# Altium PCB ARM_V2.PcbDoc (part 1 of 2)
Units mm, origin at the board's own origin, x right, y up, seen from the top; angles counter-clockwise.
Board outline 152.4 x 101.6 mm, 2 copper layers (Top Layer, Bottom Layer); 163 components, 114 nets, 562 pads, 0 vias.
Unrouted connection lines stored in the file: 405.
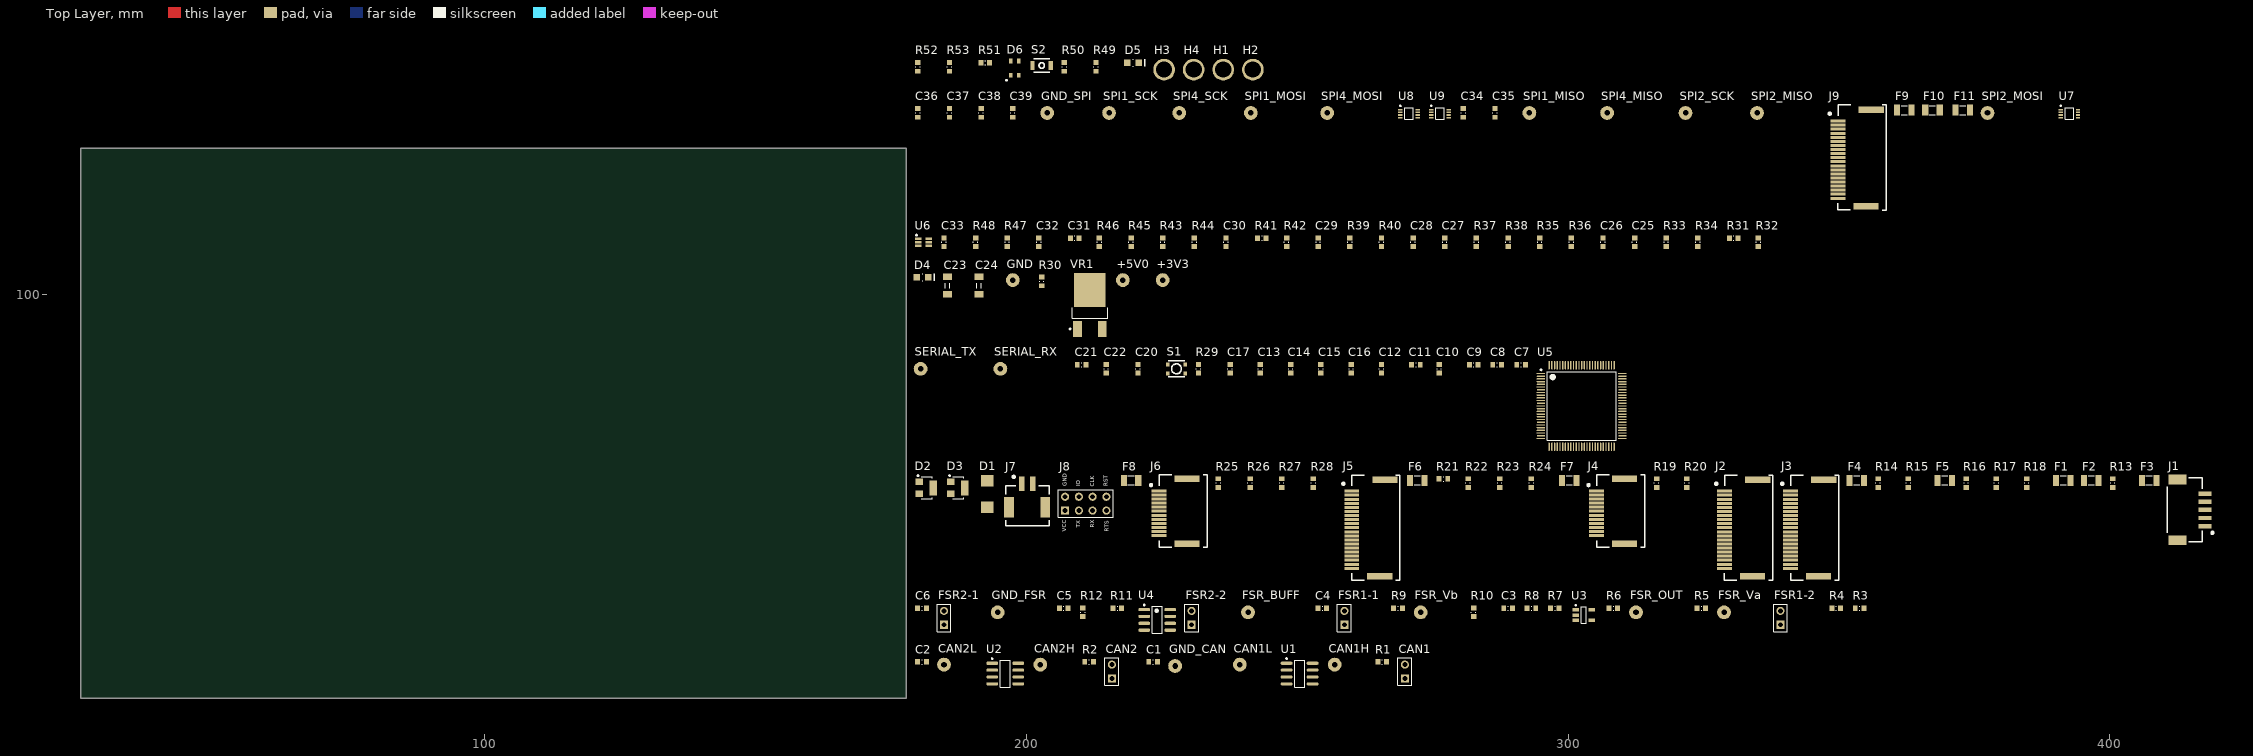
[diagram p0: Top Layer view]
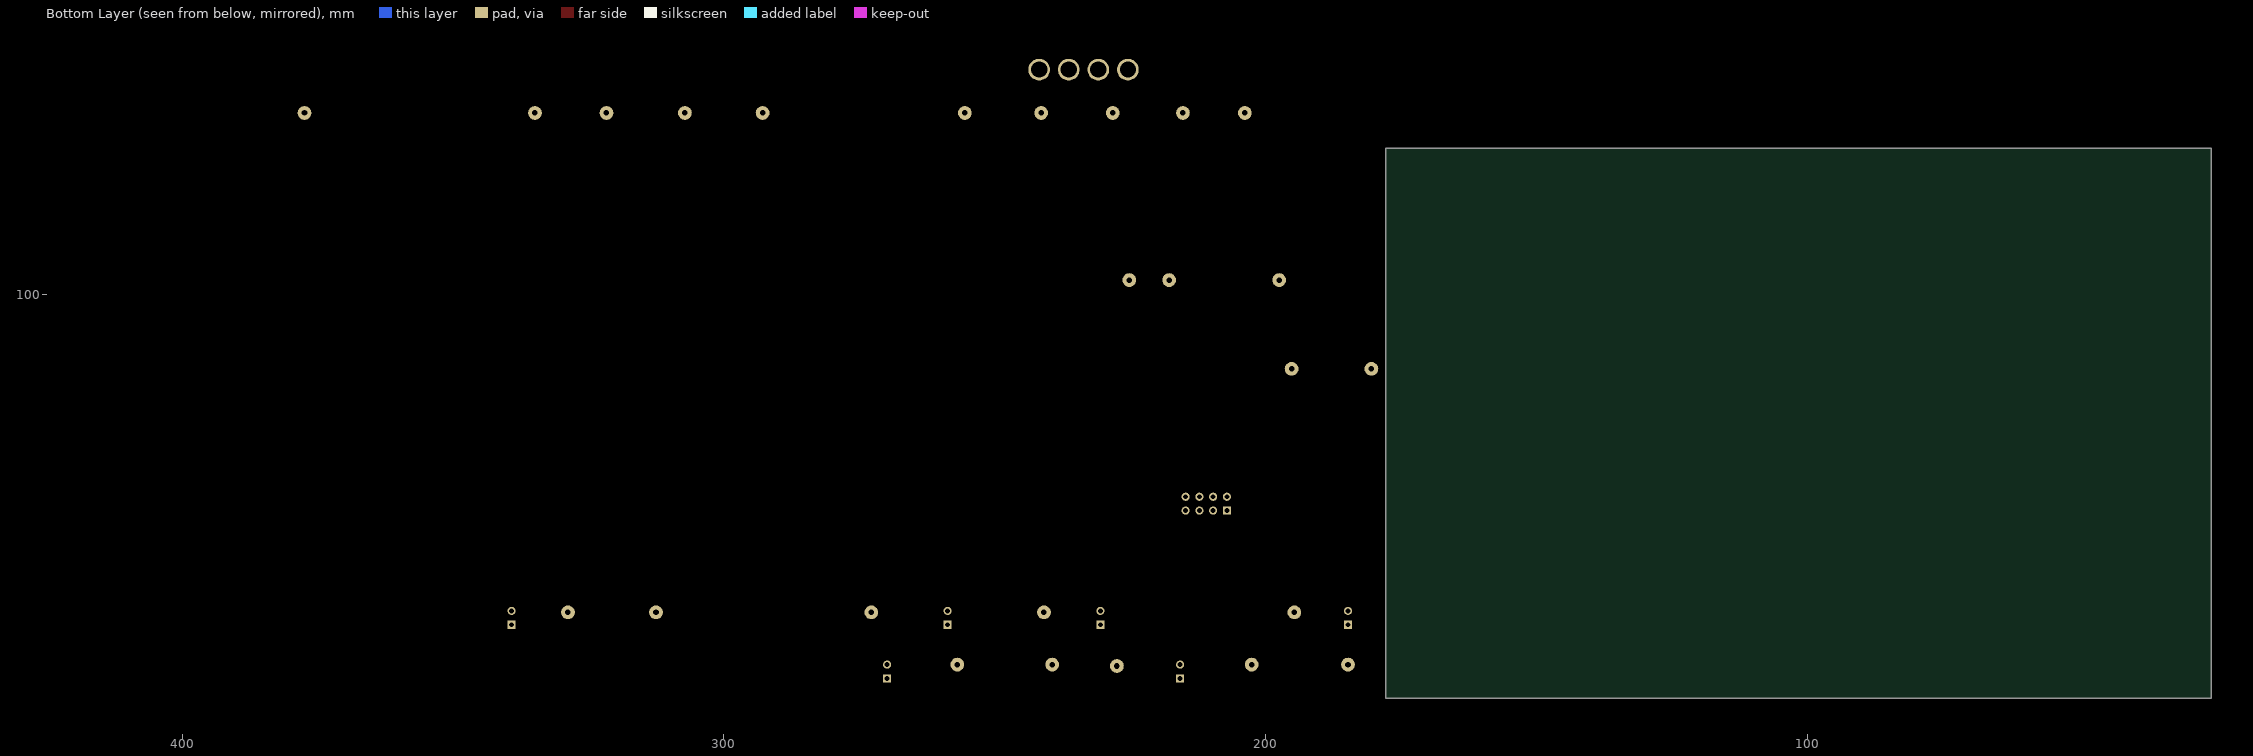
[diagram p1: Bottom Layer view, seen from below]

## Layer stack, top to bottom
Top Solder: solder mask 0.0102, Solder Resist, Dk 3.5
Top Layer: signal copper 0.0356
Dielectric 1: dielectric 0.32, FR-4, Dk 4.8
Bottom Layer: signal copper 0.0356
Bottom Solder: solder mask 0.0102, Solder Resist, Dk 3.5

## Board outline
25.4,25.4 177.8,25.4 177.8,127 25.4,127

## Design rules (kind name [scope] priority, off if disabled: settings)
Clearance [All] p1: gap=0.254 ignorepadtopadclearanceinfootprint=FALSE except(0: Arc-Hole Track-Hole SMDPad-Hole THPad-Hole Via-Hole Fill-Hole Poly-Hole Region-Hole Text-Hole)
DiffPairsRouting [All] p1: maxlimit=0.254 minlimit=0.254 mostfreqgap=0.254 toplayer_minwidth=0.381 toplayer_maxwidth=0.381 toplayer_prefwidth=0.381 bottomlayer_minwidth=0.381 bottomlayer_maxwidth=0.381 bottomlayer_prefwidth=0.381 maxuncoupledlength=12.7
PolygonConnect [All] p1: connectstyle=Relief reliefconductorwidth=0.254 reliefentries=4 polygonreliefangle="90 Angle" airgapwidth=0.254
RoomDefinition Support [InComponentClass('Support')] p1: confinementstyle=ConfineIn formatcopy=TRUE lockcomponents=FALSE outline 178.943,139.065 244.094,139.065 244.094,146.304 178.943,146.304
RoomDefinition "SPI Encoders" [InComponentClass('SPI Encoders')] p2: confinementstyle=ConfineIn formatcopy=TRUE lockcomponents=FALSE outline 178.943,115.189 394.97,115.189 394.97,137.795 178.943,137.795
RoomDefinition "Servo and Encoders" [InComponentClass('Servo and Encoders')] p3: confinementstyle=ConfineIn formatcopy=TRUE lockcomponents=FALSE outline 178.943,107.823 339.09,107.823 339.09,113.919 178.943,113.919
RoomDefinition POWER [InComponentClass('POWER')] p4: confinementstyle=ConfineIn formatcopy=TRUE lockcomponents=FALSE outline 178.943,91.821 230.124,91.821 230.124,106.68 178.943,106.68
RoomDefinition MCU [InComponentClass('MCU')] p5: confinementstyle=ConfineIn formatcopy=TRUE lockcomponents=FALSE outline 178.943,70.739 311.15,70.739 311.15,90.551 178.943,90.551
RoomDefinition "Integrated Connectors" [InComponentClass('Integrated Connectors')] p6: confinementstyle=ConfineIn formatcopy=TRUE lockcomponents=FALSE outline 178.943,46.863 419.608,46.863 419.608,69.469 178.943,69.469
RoomDefinition FSR [InComponentClass('FSR')] p7: confinementstyle=ConfineIn formatcopy=TRUE lockcomponents=FALSE outline 178.943,36.957 355.6,36.957 355.6,45.593 178.943,45.593
RoomDefinition CAN [InComponentClass('CAN')] p8: confinementstyle=ConfineIn formatcopy=TRUE lockcomponents=FALSE outline 178.943,26.924 274.32,26.924 274.32,35.687 178.943,35.687
RoutingVias [All] p1: holewidth=0.711 width=1.27 viastyle="Through Hole" minholewidth=0.711 minwidth=1.27 maxholewidth=0.711 maxwidth=1.27
SolderMaskExpansion [All] p1: expansion=0.102
Width [All] p1: maxlimit=0.254 minlimit=0.254 preferedwidth=0.254
29 further rules are at their usual default settings.

## Classes and differential pairs
component class Support: D5 D6 H1 H2 H3 H4 R49 R50 R51 R52 R53 S2
component class "SPI Encoders": C34 C35 C36 C37 C38 C39 F9 F10 F11 GND_SPI J9 SPI1_MISO SPI1_MOSI SPI1_SCK SPI2_MISO SPI2_MOSI SPI2_SCK SPI4_MISO SPI4_MOSI SPI4_SCK U7 U8 U9
component class "Servo and Encoders": C25 C26 C27 C28 C29 C30 C31 C32 C33 R31 R32 R33 R34 R35 R36 R37 R38 R39 R40 R41 R42 R43 R44 R45 R46 R47 R48 U6
component class POWER: +3V3 +5V0 C23 C24 D4 GND R30 VR1
component class MCU: C7 C8 C9 C10 C11 C12 C13 C14 C15 C16 C17 C18 C19 C20 C21 C22 R29 S1 SERIAL_RX SERIAL_TX U5 Y1
component class "Integrated Connectors": D1 D2 D3 F1 F2 F3 F4 F5 F6 F7 F8 J1 J2 J3 J4 J5 J6 J7 J8 R13 R14 R15 R16 R17 R18 R19 R20 R21 R22 R23 R24 R25 R26 R27 R28
component class FSR: C3 C4 C5 C6 FSR1-1 FSR1-2 FSR2-1 FSR2-2 FSR_BUFF FSR_OUT FSR_Va FSR_Vb GND_FSR R3 R4 R5 R6 R7 R8 R9 R10 R11 R12 U3 U4
component class CAN: C1 C2 CAN1 CAN1H CAN1L CAN2 CAN2H CAN2L GND_CAN R1 R2 U1 U2
differential pair CAN2: +CAN2_P -CAN2_N
differential pair CAN1: +CAN1_P -CAN1_N

## Components (designator, comment, footprint, x,y, rotation, side; value= is the part's Value field where it differs from the comment)
+3V3 "TESTPOINT_LOOP" TESTPOINT_LOOP 225.171,102.616 r90 top
+5V0 "TESTPOINT_LOOP" TESTPOINT_LOOP 217.805,102.616 r90 top
C1 "CAP_0.1uF_50V_0603" CAPC0603(1608)55_N 223.393,32.131 r0 top value=0.1uF
C2 "CAP_0.1uF_50V_0603" CAPC0603(1608)55_N 180.721,32.131 r0 top value=0.1uF
C3 "CAP_0.1uF_50V_0603" CAPC0603(1608)55_N 288.925,42.037 r0 top value=0.1uF
C4 "CAP_0.1uF_50V_0603" CAPC0603(1608)55_N 254.635,42.037 r0 top value=0.1uF
C5 "CAP_0.1uF_50V_0603" CAPC0603(1608)55_N 206.883,42.037 r0 top value=0.1uF
C6 "CAP_0.1uF_50V_0603" CAPC0603(1608)55_N 180.721,42.037 r0 top value=0.1uF
C7 "CAP_0.1uF_50V_0603" CAPC0603(1608)55_N 291.338,86.995 r0 top value=0.1uF
C8 "CAP_0.1uF_50V_0603" CAPC0603(1608)55_N 286.893,86.995 r0 top value=0.1uF
C9 "CAP_0.1uF_50V_0603" CAPC0603(1608)55_N 282.575,86.995 r0 top value=0.1uF
C10 "CAP_0.1uF_50V_0603" CAPC0603(1608)55_N 276.225,86.233 r90 top value=0.1uF
C11 "CAP_0.1uF_50V_0603" CAPC0603(1608)55_N 271.907,86.995 r0 top value=0.1uF
C12 "CAP_0.1uF_50V_0603" CAPC0603(1608)55_N 265.557,86.233 r90 top value=0.1uF
C13 "CAP_10nF_0603" CAPC0603(1608)55_N 243.205,86.233 r90 top value=10nF
C14 "CAP_0.1uF_50V_0603" CAPC0603(1608)55_N 248.793,86.233 r90 top value=0.1uF
C15 "CAP_10nF_0603" CAPC0603(1608)55_N 254.381,86.233 r90 top value=10nF
C16 "CAP_1uF_16V_0603" CAPC0603(1608)55_N 259.969,86.233 r90 top value=1uF
C17 "CAP_0.1uF_50V_0603" CAPC0603(1608)55_N 237.617,86.233 r90 top value=0.1uF
C20 "CAP_0.1uF_50V_0603" CAPC0603(1608)55_N 220.599,86.233 r90 top value=0.1uF
C21 "CAP_4.7uF_0603" CAPC0603(1608)55_N 210.185,86.995 r0 top value=4.7uF
C22 "CAP_4.7uF_0603" CAPC0603(1608)55_N 214.757,86.233 r90 top value=4.7uF
C23 "10uF" CAPC1206(3216) 185.42,101.6 r90 top
C24 "10uF" CAPC1206(3216) 191.262,101.6 r90 top
C25 "CAP_DNP_0603_1_1" CAPC0603(1608)55_N 312.293,109.601 r90 top value=DNP
C26 "CAP_DNP_0603_1_1" CAPC0603(1608)55_N 306.451,109.601 r90 top value=DNP
C27 "CAP_DNP_0603_1_1" CAPC0603(1608)55_N 277.241,109.601 r90 top value=DNP
C28 "CAP_DNP_0603_1_1" CAPC0603(1608)55_N 271.399,109.601 r90 top value=DNP
C29 "CAP_DNP_0603_1_1" CAPC0603(1608)55_N 253.873,109.601 r90 top value=DNP
C30 "CAP_DNP_0603_1_1" CAPC0603(1608)55_N 236.855,109.601 r90 top value=DNP
C31 "CAP_DNP_0603_1_1" CAPC0603(1608)55_N 208.915,110.363 r0 top value=DNP
C32 "CAP_DNP_0603_1_1" CAPC0603(1608)55_N 202.311,109.601 r90 top value=DNP
C33 "CAP_DNP_0603_1_1" CAPC0603(1608)55_N 184.785,109.601 r90 top value=DNP
C34 "CAP_0.1uF_50V_0603" CAPC0603(1608)55_N 280.67,133.477 r90 top value=0.1uF
C35 "CAP_0.1uF_50V_0603" CAPC0603(1608)55_N 286.512,133.477 r90 top value=0.1uF
C36 "CAP_0.1uF_50V_0603" CAPC0603(1608)55_N 179.959,133.477 r90 top value=0.1uF
C37 "CAP_0.1uF_50V_0603" CAPC0603(1608)55_N 185.801,133.477 r90 top value=0.1uF
C38 "CAP_0.1uF_50V_0603" CAPC0603(1608)55_N 191.643,133.477 r90 top value=0.1uF
C39 "CAP_0.1uF_50V_0603" CAPC0603(1608)55_N 197.485,133.477 r90 top value=0.1uF
CAN1 "JUMPER_2" HDR1X2 269.875,29.083 r90 top
CAN1H "TESTPOINT_LOOP" TESTPOINT_LOOP 256.921,31.623 r90 top
CAN1L "TESTPOINT_LOOP" TESTPOINT_LOOP 239.395,31.623 r90 top
CAN2 "JUMPER_2" HDR1X2 215.773,29.083 r90 top
CAN2H "TESTPOINT_LOOP" TESTPOINT_LOOP 202.565,31.623 r90 top
CAN2L "TESTPOINT_LOOP" TESTPOINT_LOOP 184.785,31.623 r90 top
D1 "TVS_DIODE_BIDIRECTIONAL" TVS_DIODE_BIDIRECTIONAL 192.786,63.119 r90 top
D2 "TVS_DIODE_CAN" TVS_DIODE_CAN 181.483,64.262 r0 top
D3 "TVS_DIODE_CAN" TVS_DIODE_CAN 187.325,64.262 r0 top
D4 "DIO_LED_G" LED_0805_LINE 180.848,103.124 r0 top
D5 "DIO_LED_G" LED_0805_LINE 219.71,142.748 r0 top
D6 "LED_RGB" LED_RGB 197.866,141.732 r0 top
F1 "FUSE_125mA_1206" FUSE_1206 391.414,65.659 r0 top
F2 "FUSE_1.25A_1206" FUSE_1206 396.621,65.659 r0 top
F3 "FUSE_125mA_1206" FUSE_1206 407.289,65.659 r0 top
F4 "FUSE_125mA_1206" FUSE_1206 353.314,65.659 r0 top
F5 "FUSE_125mA_1206" FUSE_1206 369.57,65.659 r0 top
F6 "FUSE_125mA_1206" FUSE_1206 272.161,65.659 r0 top
F7 "FUSE_125mA_1206" FUSE_1206 300.228,65.659 r0 top
F8 "FUSE_2A_1206" FUSE_1206 219.329,65.659 r0 top
F9 "FUSE_125mA_1206" FUSE_1206 362.077,133.985 r0 top
F10 "FUSE_125mA_1206" FUSE_1206 367.284,133.985 r0 top
F11 "FUSE_125mA_1206" FUSE_1206 372.872,133.985 r0 top
FSR1-1 "JUMPER_2" HDR1X2 258.699,38.989 r90 top
FSR1-2 "JUMPER_2" HDR1X2 339.217,38.989 r90 top
FSR2-1 "JUMPER_2" HDR1X2 184.785,38.989 r90 top
FSR2-2 "JUMPER_2" HDR1X2 230.505,38.989 r90 top
FSR_BUFF "TESTPOINT_LOOP" TESTPOINT_LOOP 240.919,41.275 r90 top
FSR_OUT "TESTPOINT_LOOP" TESTPOINT_LOOP 312.547,41.275 r90 top
FSR_Va "TESTPOINT_LOOP" TESTPOINT_LOOP 328.803,41.275 r90 top
FSR_Vb "TESTPOINT_LOOP" TESTPOINT_LOOP 272.796,41.275 r90 top
GND "TESTPOINT_LOOP" TESTPOINT_LOOP 197.485,102.616 r0 top
GND_CAN "TESTPOINT_LOOP" TESTPOINT_LOOP 227.457,31.369 r90 top
GND_FSR "TESTPOINT_LOOP" TESTPOINT_LOOP 194.691,41.275 r90 top
GND_SPI "TESTPOINT_LOOP" TESTPOINT_LOOP 203.835,133.477 r90 top
H1 "MOUNTING_HOLES" MOUNTING_HOLE 236.347,141.478 r0 top
H2 "MOUNTING_HOLES" MOUNTING_HOLE 241.808,141.478 r0 top
H3 "MOUNTING_HOLES" MOUNTING_HOLE 225.425,141.478 r0 top
H4 "MOUNTING_HOLES" MOUNTING_HOLE 230.886,141.478 r0 top
J1 "CON_5M_SM_VT" MOLEX-5025840570 415.036,60.198 r90 top
J2 "CON_10x2M_SM_RA" MOLEX-5031482090 331.47,56.896 r90 top
J3 "CON_10x2M_SM_RA" MOLEX-5031482090 343.662,56.896 r90 top
J4 "CON_6x2M_SM_RA" MOLEX-5031481290 307.848,59.944 r90 top
J5 "CON_10x2M_SM_RA" MOLEX-5031482090 262.636,56.896 r90 top
J6 "CON_6x2M_SM_RA" MOLEX-5031481290 227.076,59.944 r90 top
J7 "CON_2M_SM_RA" MOLEX-5024940270 200.152,62.865 r0 top
J8 "HEADER 4X2" HEADER_2X4 207.137,60.071 r0 top
J9 "CON_10x2M_SM_RA" MOLEX-5031482090 352.425,125.222 r90 top
R1 "RES_120R_0603" RESC0603(1608)_N 265.684,32.131 r0 top value=120R
R2 "RES_120R_0603" RESC0603(1608)_N 211.582,32.131 r0 top value=120R
R3 "RES_825K_0603" RESC0603(1608)_N 353.822,42.037 r0 top value=825K
R4 "1.1K 1%" RESC0603(1608)_N 349.504,42.037 r0 top value=1K1
R5 "RES_165K_0603" RESC0603(1608)_N 324.612,42.037 r0 top value=165K
R6 "RES_14K3_0603" RESC0603(1608)_N 308.356,42.037 r0 top value=14K3
R7 "RES_165K_0603" RESC0603(1608)_N 297.561,42.037 r0 top value=165K
R8 "RES_2K2_0603" RESC0603(1608)_N 293.243,42.037 r0 top value=2K2
R9 "14.3K 1%" RESC0603(1608)_N 268.605,42.037 r0 top value=14K3
R10 "RES_825K_0603" RESC0603(1608)_N 282.575,41.275 r90 top value=825K
R11 "RES_14K3_0603" RESC0603(1608)_N 216.789,42.037 r0 top value=14K3
R12 "RES_1K_0603" RESC0603(1608)_N 210.439,41.275 r90 top value=1K
R13 "RES_10K_0603" RESC0603(1608)_N 400.558,65.151 r90 top value=10K
R14 "RES_10K_0603" RESC0603(1608)_N 357.251,65.151 r90 top value=10K
R15 "RES_10K_0603" RESC0603(1608)_N 362.839,65.151 r90 top value=10K
R16 "RES_10K_0603" RESC0603(1608)_N 373.507,65.151 r90 top value=10K
R17 "RES_10K_0603" RESC0603(1608)_N 379.095,65.151 r90 top value=10K
R18 "RES_10K_0603" RESC0603(1608)_N 384.683,65.151 r90 top value=10K
R19 "RES_10K_0603" RESC0603(1608)_N 316.357,65.151 r90 top value=10K
R20 "RES_10K_0603" RESC0603(1608)_N 321.945,65.151 r90 top value=10K
R21 "RES_10K_0603" RESC0603(1608)_N 276.987,65.913 r0 top value=10K
R22 "RES_10K_0603" RESC0603(1608)_N 281.559,65.151 r90 top value=10K
R23 "RES_10K_0603" RESC0603(1608)_N 287.401,65.151 r90 top value=10K
R24 "RES_10K_0603" RESC0603(1608)_N 293.243,65.151 r90 top value=10K
R25 "RES_10K_0603" RESC0603(1608)_N 235.458,65.151 r90 top value=10K
R26 "RES_10K_0603" RESC0603(1608)_N 241.3,65.151 r90 top value=10K
R27 "RES_10K_0603" RESC0603(1608)_N 247.142,65.151 r90 top value=10K
R28 "RES_10K_0603" RESC0603(1608)_N 252.984,65.151 r90 top value=10K
R29 "RES_10K_0603" RESC0603(1608)_N 231.775,86.233 r90 top value=10K
R30 "RES_120R_0603" RESC0603(1608)_N 202.819,102.362 r90 top value=120R
R31 "RES_2K2_0603" RESC0603(1608)_N 330.581,110.363 r0 top value=2K2
R32 "RES_2K2_0603" RESC0603(1608)_N 335.153,109.601 r90 top value=2K2
R33 "RES_3K3_0603" RESC0603(1608)_N 318.135,109.601 r90 top value=3K3
R34 "RES_3K3_0603" RESC0603(1608)_N 323.977,109.601 r90 top value=3K3
R35 "RES_2K2_0603" RESC0603(1608)_N 294.767,109.601 r90 top value=2K2
R36 "RES_2K2_0603" RESC0603(1608)_N 300.609,109.601 r90 top value=2K2
R37 "RES_3K3_0603" RESC0603(1608)_N 283.083,109.601 r90 top value=3K3
R38 "RES_3K3_0603" RESC0603(1608)_N 288.925,109.601 r90 top value=3K3
R39 "RES_2K2_0603" RESC0603(1608)_N 259.715,109.601 r90 top value=2K2
R40 "RES_2K2_0603" RESC0603(1608)_N 265.557,109.601 r90 top value=2K2
R41 "RES_3K3_0603" RESC0603(1608)_N 243.459,110.363 r0 top value=3K3
R42 "RES_3K3_0603" RESC0603(1608)_N 248.031,109.601 r90 top value=3K3
R43 "RES_2K2_0603" RESC0603(1608)_N 225.171,109.601 r90 top value=2K2
R44 "RES_2K2_0603" RESC0603(1608)_N 231.013,109.601 r90 top value=2K2
R45 "RES_3K3_0603" RESC0603(1608)_N 219.329,109.601 r90 top value=3K3
R46 "RES_3K3_0603" RESC0603(1608)_N 213.487,109.601 r90 top value=3K3
R47 "RES_2K2_0603" RESC0603(1608)_N 196.469,109.601 r90 top value=2K2
R48 "RES_3K3_0603" RESC0603(1608)_N 190.627,109.601 r90 top value=3K3
R49 "RES_120R_0603" RESC0603(1608)_N 212.852,141.986 r90 top value=120R
R50 "RES_10K_0603" RESC0603(1608)_N 207.01,141.986 r90 top value=10K
R51 "RES_20R_0603" RESC0603(1608)_N 192.405,142.748 r0 top value=20R
R52 "RES_120R_0603" RESC0603(1608)_N 179.959,141.986 r90 top value=120R
R53 "RES_20R_0603" RESC0603(1608)_N 185.801,141.986 r90 top value=20R
S1 "SW_PWR" PTS830GM140 227.711,86.233 r0 top
S2 "SW_TACTILE" B3U-1100P 202.819,142.24 r0 top
SERIAL_RX "TESTPOINT_LOOP" TESTPOINT_LOOP 195.199,86.233 r90 top
SERIAL_TX "TESTPOINT_LOOP" TESTPOINT_LOOP 180.467,86.233 r90 top
SPI1_MISO "TESTPOINT_LOOP" TESTPOINT_LOOP 292.862,133.477 r90 top
SPI1_MOSI "TESTPOINT_LOOP" TESTPOINT_LOOP 241.427,133.477 r90 top
SPI1_SCK "TESTPOINT_LOOP" TESTPOINT_LOOP 215.265,133.477 r90 top
SPI2_MISO "TESTPOINT_LOOP" TESTPOINT_LOOP 334.899,133.477 r90 top
SPI2_MOSI "TESTPOINT_LOOP" TESTPOINT_LOOP 377.444,133.477 r90 top
SPI2_SCK "TESTPOINT_LOOP" TESTPOINT_LOOP 321.691,133.477 r90 top
SPI4_MISO "TESTPOINT_LOOP" TESTPOINT_LOOP 307.213,133.477 r90 top
SPI4_MOSI "TESTPOINT_LOOP" TESTPOINT_LOOP 255.524,133.477 r90 top
SPI4_SCK "TESTPOINT_LOOP" TESTPOINT_LOOP 228.219,133.477 r90 top
U1 "IC TXRX CAN" LT-S8_N 250.444,29.972 r0 top
U2 "IC TXRX CAN" LT-S8_N 196.088,29.972 r0 top
U3 "OPA313IDBVR" DBV0005A_M 302.895,40.767 r0 top
U4 "CA3140AMZ" CA3140AMZ 224.155,39.878 r0 top
U5 "STM32F446VET7" STM-LQFP100_L 302.514,79.375 r0 top
U6 "SN74LVC1T45QDCKRQ1" SOT65P210X110-6N 180.975,109.601 r0 top
U7 "SN74LVC2T45DCURG4" DCU0008A_N 392.557,133.35 r0 top
U8 "SN74LVC2T45DCURG4" DCU0008A_N 270.637,133.35 r0 top
U9 "SN74LVC2T45DCURG4" DCU0008A_N 276.352,133.35 r0 top
VR1 "5V0_3V3_LDO" VOLTAGE_REGULATOR 211.709,96.393 r0 top

## Footprints (in the part's own frame and the unit in brackets; to place one, negate y for a bottom-side part, rotate by r counter-clockwise, add the part's x,y. Pads: shape width x height; smd on the part's side, far side on the other; paste and mask are expansions set on the pad)
B3U-1100P [mm] "TACTILE SWITCH GREY"
  rect 0.8x1.7 smd: 1(-1.7,0) 2(1.7,0)
  silkscreen extent -1.5,-1.25 1.5,1.25, body extent -2,-1.25 2,1.25, height 1.6
CA3140AMZ [mm]
  oval 2.2x0.6 smd: 1(-2.4,1.905) 2(-2.4,0.635) 3(-2.4,-0.635) 4(-2.4,-1.905) 5(2.4,-1.905) 6(2.4,-0.635) 7(2.4,0.635) 8(2.4,1.905)
  silkscreen extent -2.52,-2.5 0.9,2.88, body extent -2,-2.5 2,2.5, height 1.75
CAPC0603(1608)55_N [mm] "Chip Capacitor, Body 1.6x0.8mm, Height 0.55mm, IPC Medium Density"
  rect 0.9x1 smd: 1(-0.8,0) 2(0.8,0)
  silkscreen extent -0.05,-0.4 0.05,0.4, body extent -0.87,-0.48 0.88,0.47, height 0.55
CAPC1206(3216) [mm] "Chip Capacitor, Body 3.2x1.6mm, Height 0.55mm, IPC Medium Density"
  rect 1.2x1.7 smd: 1(-1.6,0) 2(1.6,0)
  silkscreen extent -0.45,-0.4 0.45,0.4, body extent -1.6,-0.85 1.6,0.85, height 1.75
DBV0005A_M [mm] "SOT23, 5-Leads, Body 3.05x1.75mm, Pitch 0.95mm, IPC Low Density"
  rrect15% 1.2x0.65 smd: 1(-1.475,0.95) 2(-1.475,0) 3(-1.475,-0.95) 4(1.475,-0.95) 5(1.475,0.95)
  silkscreen extent -1.6,-1.55 0.5,1.95, body extent -1.42,-1.46 1.42,1.46, height 1.08
DCU0008A_N [mm] "SOP, 8-Leads, Body 2.4x2.1mm, Pitch 0.5mm, IPC Medium Density"
  rrect33% 0.8x0.3 smd: 1(-1.6,0.75) 2(-1.6,0.25) 3(-1.6,-0.25) 4(-1.6,-0.75) 5(1.6,-0.75) 6(1.6,-0.25) 7(1.6,0.25) 8(1.6,0.75)
  silkscreen extent -1.72,-1.05 0.8,1.57, body extent -1.56,-1 1.56,1, height 0.9
FUSE_1206 [mil]
  rect 45x80 smd mask+1: 1(-52.5,0) 2(52.5,0)
  silkscreen extent -23,-32 22,32, body extent -65,-32 65,32, height 32
HDR1X2 [mm] "Connector; Header; 2 Position"
  rect 1.5x1.5 hole 0.9: 1(0,0)
  round 1.5 hole 0.9: 2(2.54,0)
  silkscreen extent -1.27,-1.27 3.81,1.27, body extent -1.27,-1.27 3.81,1.27, height 6.35
HEADER_2X4 [mm]
  rect 1.5x1.5 hole 0.9: 1(0,0)
  round 1.5 hole 0.9: 2(2.54,0) 3(5.08,0) 4(7.62,0) 5(0,2.54) 6(2.54,2.54) 7(5.08,2.54) 8(7.62,2.54)
  silkscreen extent -1.27,-1.27 8.89,3.81, body extent -1.36,-1.32 8.8,3.67, height 8.54
LED_0805_LINE [mm] "SMD, 2-Leads, Body 2x1.25mm"
  rect 1.2x1.2 smd: 1(-1.05,0) 2(1.05,0)
  silkscreen extent -0.05,-0.64 2.16,0.64, body extent -1,-0.63 1,0.63, height 0.8
LED_RGB [mm]
  rect 0.7x0.86 smd: 1(-0.737,-1.325) 2(-0.737,1.325) 3(0.738,1.325) 4(0.738,-1.325)
  silkscreen extent -1.65,-2.35 -1.4,-2.1, body extent -1.4,-1.75 1.4,1.75, height 1.89
LT-S8_N [mm] "SOP, 8-Leads, Body 4.9x3.9mm, Pitch 1.27mm, IPC Medium Density"
  oval 2.2x0.6 smd: 1(-2.4,1.905) 2(-2.4,0.635) 3(-2.4,-0.635) 4(-2.4,-1.905) 5(2.4,-1.905) 6(2.4,-0.635) 7(2.4,0.635) 8(2.4,1.905)
  silkscreen extent -2.52,-2.5 0.9,2.88, body extent -2,-2.5 2,2.5, height 1.76
MOLEX-5024940270 [mm] "Molex 5024940670 2 pin 2mm pitch SMD RA connector"
  rect 1.8x3.8 smd: 0(-3.35,-2.175) 0(3.35,-2.175)
  rect 1x2.7 smd: 1(-1,2.175) 2(1,2.175)
  silkscreen extent -4,-5.64 4.06,3.62, body extent -4,-5.74 4,2.76, height 6.91
MOLEX-5025840570 [mm] "Molex 5024940670 12 pin 1.5 mm pitch SMD vertical connector"
  rect 1.8x3.3 smd: 0(-5.6,2.525) 0(5.6,2.525)
  rect 0.8x2.4 smd: 1(-3,-2.525) 2(-1.5,-2.525) 3(0,-2.525) 4(1.5,-2.525) 5(3,-2.525)
  silkscreen extent -5.9,-4.14 5.9,4.39, body extent -5.9,-3.01 5.9,4.39, height 7.31
MOLEX-5031481290 [mm] "Molex 5024940670 12 pin 1.5 mm pitch SMD RA connector"
  rect 1.2x4.65 smd: 0(-5.98,-2.587) 0(5.98,-2.587)
  rect 0.55x2.7 smd: 1(3.75,2.588) 2(3,2.588) 3(2.25,2.588) 4(1.5,2.588) 5(0.75,2.588) 6(0,2.588) 7(-0.75,2.588) 8(-1.5,2.588) 9(-2.25,2.588) 10(-3,2.588) 11(-3.75,2.588) 12(-4.5,2.588)
  silkscreen extent -6.68,-6.28 6.7,4.26, body extent -6.65,-6.15 6.65,3.4, height 9.21
MOLEX-5031482090 [mm] "Molex 5024940670 20 pin 1.5 mm pitch SMD RA connector"
  rect 1.2x4.65 smd: 0(-8.98,-2.587) 0(8.89,-3.556)
  rect 0.55x2.7 smd: 1(6.75,2.588) 2(6,2.588) 3(5.25,2.588) 4(4.5,2.588) 5(3.75,2.588) 6(3,2.588) 7(2.25,2.588) 8(1.5,2.588) 9(0.75,2.588) 10(0,2.588) 11(-0.75,2.588) 12(-1.5,2.588) 13(-2.25,2.588) 14(-3,2.588) 15(-3.75,2.588) 16(-4.5,2.588) 17(-5.25,2.588) 18(-6,2.588) 19(-6.75,2.588) 20(-7.5,2.588)
  silkscreen extent -9.68,-6.28 9.73,4.31, body extent -9.65,-6.28 9.65,3.27, height 9.21
MOUNTING_HOLE [mm]
  round 4 hole 3 unplated: 0(0,0)
PTS830GM140 [mm] "PWR TACTILE SWITCH (RED)"
  rect 0.7x0.75 smd: 1(-1.625,0.825) 1(1.625,0.825) 2(-1.625,-0.825) 2(1.625,-0.825)
  silkscreen extent -1.53,-1.5 1.53,1.5, body extent -1.75,-1.3 1.75,1.3, height 1.35
RESC0603(1608)_N [mm] "Chip Resistor, Body 1.6x0.8mm, IPC Medium Density"
  rect 0.9x1 smd: 1(-0.8,0) 2(0.8,0)
  silkscreen extent -0.05,-0.4 0.05,0.4, body extent -0.85,-0.47 0.85,0.47, height 0.6
SOT65P210X110-6N [mm]
  rect 1.2x0.4 smd: 1(-0.95,0.65) 2(-0.95,0) 3(-0.95,-0.65) 4(0.95,-0.65) 5(0.95,0) 6(0.95,0.65)
  silkscreen extent -1.39,1.2 -1.14,1.45, body extent -1.05,-1 1.05,1, height 1.1
STM-LQFP100_L [mm] "Thin QFP, 100-Leads, Body 14x14mm, Pitch 0.5mm, IPC High Density"
  oval 1.55x0.25 smd: 1(-7.525,6) 2(-7.525,5.5) 3(-7.525,5) 4(-7.525,4.5) 5(-7.525,4) 6(-7.525,3.5) 7(-7.525,3) 8(-7.525,2.5) 9(-7.525,2) 10(-7.525,1.5) 11(-7.525,1) 12(-7.525,0.5) 13(-7.525,0) 14(-7.525,-0.5) 15(-7.525,-1) 16(-7.525,-1.5) 17(-7.525,-2) 18(-7.525,-2.5) 19(-7.525,-3) 20(-7.525,-3.5) 21(-7.525,-4) 22(-7.525,-4.5) 23(-7.525,-5) 24(-7.525,-5.5) 25(-7.525,-6) 51(7.525,-6) 52(7.525,-5.5) 53(7.525,-5) 54(7.525,-4.5) 55(7.525,-4) 56(7.525,-3.5) 57(7.525,-3) 58(7.525,-2.5) 59(7.525,-2) 60(7.525,-1.5) 61(7.525,-1) 62(7.525,-0.5) 63(7.525,0) 64(7.525,0.5) 65(7.525,1) 66(7.525,1.5) 67(7.525,2) 68(7.525,2.5) 69(7.525,3) 70(7.525,3.5) 71(7.525,4) 72(7.525,4.5) 73(7.525,5) 74(7.525,5.5) 75(7.525,6)
  oval 0.25x1.55 smd: 26(-6,-7.525) 27(-5.5,-7.525) 28(-5,-7.525) 29(-4.5,-7.525) 30(-4,-7.525) 31(-3.5,-7.525) 32(-3,-7.525) 33(-2.5,-7.525) 34(-2,-7.525) 35(-1.5,-7.525) 36(-1,-7.525) 37(-0.5,-7.525) 38(0,-7.525) 39(0.5,-7.525) 40(1,-7.525) 41(1.5,-7.525) 42(2,-7.525) 43(2.5,-7.525) 44(3,-7.525) 45(3.5,-7.525) 46(4,-7.525) 47(4.5,-7.525) 48(5,-7.525) 49(5.5,-7.525) 50(6,-7.525) 76(6,7.525) 77(5.5,7.525) 78(5,7.525) 79(4.5,7.525) 80(4,7.525) 81(3.5,7.525) 82(3,7.525) 83(2.5,7.525) 84(2,7.525) 85(1.5,7.525) 86(1,7.525) 87(0.5,7.525) 88(0,7.525) 89(-0.5,7.525) 90(-1,7.525) 91(-1.5,7.525) 92(-2,7.525) 93(-2.5,7.525) 94(-3,7.525) 95(-3.5,7.525) 96(-4,7.525) 97(-4.5,7.525) 98(-5,7.525) 99(-5.5,7.525) 100(-6,7.525)
  silkscreen extent -7.65,-6.35 6.35,6.8, body extent -7,-7 7,7, height 1.6
TESTPOINT_LOOP [mm]
  round 2.54 hole 1.02: 1(0,0)
  body extent -1.27,-1.27 1.27,1.27, height 4.57
TVS_DIODE_BIDIRECTIONAL [mm]
  rect 2.16x2.26 smd: 1(-2.45,0) 2(2.45,0)
  body extent -2.7,-1.8 2.7,1.8, height 2.27
TVS_DIODE_CAN [mm] "SOT23, 3-Leads, Body 2.95x2.80mm, Pitch 0.95mm, IPC Low Density"
  rect 1.4x1.2 smd: 1(-1.3,1.1) 2(-1.3,-1.1)
  rect 1.4x2.8 smd: 3(1.3,0)
  silkscreen extent -1.62,-2.02 1.09,2.37, body extent -1.5,-1.55 1.5,1.55, height 1.25
VOLTAGE_REGULATOR [mm] "DPAK, 3-Leads, Body 6.095x6.54mm, Pitch 4.57mm"
  rect 1.6x3 smd: 1(-2.285,-2.79) 3(2.285,-2.79)
  rect 5.8x6.2 smd: 2(0,4.39)
  silkscreen extent -3.76,-2.91 3.27,1.14, body extent -3.27,-0.84 3.27,5.25, height 2.38

## Part data
+3V3 +5V0 CAN1H CAN1L CAN2H CAN2L FSR_BUFF FSR_OUT FSR_Va FSR_Vb GND GND_CAN GND_FSR GND_SPI SERIAL_RX SERIAL_TX SPI1_MISO SPI1_MOSI SPI1_SCK SPI2_MISO SPI2_MOSI SPI2_SCK SPI4_MISO SPI4_MOSI SPI4_SCK: "Loop testpoint through-hole pad", Manufacturer="Keystone Electronics", Manufacturer Part Number 1=5002, Supplier Part Number 1=36-5002-ND, Supplier 1=Digi-Key
C1 C2 C3 C4 C5 C6 C7 C8 C9 C10 C11 C12 C14 C17 C20 C34 C35 C36 C37 C38 C39: "CAP CER 0.1UF 50V X7R 0603", Manufacturer=Yageo, MPN=CC0603KRX7R9BB104, Package="0603 (1608 Metric)", Supplier Part Number 1=311-1344-1-ND, Temperature Coefficient=X7R, Voltage Rating=50V, Dimensions="0.063\" L x 0.031\" W (1.60mm x 0.80mm)", Supplier 1=Digi-Key
C13 C15: "CAP CER 10000PF 16V X7R 0603", Manufacturer=Yageo, MPN=CC0603KRX7R7BB103, Package="0603 (1608 Metric)", Supplier Part Number 1=311-3369-1-ND, Temperature Coefficient=X7R, Voltage Rating=16V, Dimensions="0.063\" L x 0.031\" W (1.60mm x 0.80mm)", Supplier 1=Digi-Key
C16: "CAP CER 1UF 16V Y5V 0603", Manufacturer=Yageo, MPN=CC0603ZRY5V7BB105, Package="0603 (1608 Metric)", Supplier Part Number 1=311-1372-1-ND, Temperature Coefficient=Y5V, Voltage Rating=16V, Dimensions="0.063\" L x 0.031\" W (1.60mm x 0.80mm)", Supplier 1=Digi-Key
C21 C22: "CAP CER 4.7UF 6.3V X5R 0603", Manufacturer=Yageo, MPN=CC0603KRX5R5BB475, Package="0603 (1608 Metric)", Supplier Part Number 1=311-1521-1-ND, Temperature Coefficient=X5R, Voltage Rating=6.3V, Dimensions="0.063\" L x 0.031\" W (1.60mm x 0.80mm)", Supplier 1=Digi-Key
C23 C24: library part CAP_10uF_50V_1206, "CAP CER 10UF 50V X5R 1206", Manufacturer=Murata, MPN=GRT31CR61H106KE01L, Package="1206 (3216 Metric)", Supplier Part Number 1=490-12456-1-ND, Voltage Rating=50V, Dimensions="0.126\" L x 0.063\" W (3.20mm x 1.6mm)", Supplier 1=Digi-Key
C25 C26 C27 C28 C29 C30 C31 C32 C33: "CAP DNP 0603", Package="0603 (1608 Metric)", Dimensions="0.063\" L x 0.031\" W (1.60mm x 0.80mm)"
CAN1 CAN2 FSR1-1 FSR1-2 FSR2-1 FSR2-2: "HEADER 2X1"
D1: "TVS DIODE 5V 9.2V DO214AA", Breakdown Voltage=6.4V, Clamping Voltage=9.2V, Manufacturer 1=Littelfuse, Manufacturer Part Number 1=SMBJ5.0CA, Max Breakdown Voltage=7V, Max Operating Temperature=150∑C, Max Surge Current=65.3A, Min Operating Temperature=-65∑C, Package="DO-214AA, SMB", Peak Pulse Power=600W, Reverse Standoff Voltage=5V, Supplier Part Number 1=SMBJ5.0CALFCT-ND, ComponentLink1Description=Datasheet, ComponentLink1URL=https://www.littelfuse.com/~/media/electronics/datasheets/tvs_diodes/littelfuse_tvs_diode_smbj_datasheet.pdf.pdf, Composition=Zener, Direction=Bidirectional, ESD Protection=Yes, Min Breakdown Voltage=6.4V, Mount="Surface Mount", Peak Pulse Current=65.3A, Polarity=Bidirectional, Power Dissipation=600W, Reverse Breakdown Voltage=6.4V, Supplier 1=Digi-Key
D2 D3: "TVS DIODE 24V 41V SOT323-3", Manufacturer 1="Nexperia USA Inc.", Manufacturer Part Number 1=PESD2CAN,215, Package="SC-70, SOT-323", Supplier Part Number 1=1727-3891-1-ND, ComponentLink1Description=Datasheet, ComponentLink1URL=https://assets.nexperia.com/documents/data-sheet/PESD1CAN-U.pdf, Mount="Surface Mount", Supplier 1=Digi-Key
D4 D5: "LED GREEN DIFFUSED 0805 SMD", Forward Voltage Drop=2.2V, Manufacturer=OSRAM, MPN="LG R971-KN-1", Package="0805 (2012 Metric)", Supplier Part Number 1=475-1410-1-ND, Supplier 1=Digi-Key
D6: "LED RGB DIFFUSED 4PLCC SMD", Case/Package=PLCC, Color=Blue,Green,Red, Forward Voltage=3.1V, Lens Color=White, Manufacturer 1=Broadcom, Manufacturer Part Number 1=ASMB-MTB1-0A3A2, Supplier Part Number 1=516-3280-1-ND, Test Current=20mA, ComponentLink1Description=http://www.farnell.com/datasheets/2111106.pdf?src-supplier=Farnell, ComponentLink1URL=http://www.farnell.com/datasheets/2111106.pdf?src-supplier=Farnell, ComponentLink2Description=https://docs.broadcom.com/docs/AV02-4194EN?src-supplier=Digi-Key, ComponentLink2URL=https://docs.broadcom.com/docs/AV02-4194EN?src-supplier=Digi-Key, ComponentLink3Description=http://www.farnell.com/datasheets/1801564.pdf?src-supplier=Element14, ComponentLink3URL=http://www.farnell.com/datasheets/1801564.pdf?src-supplier=Element14, ComponentLink4Description=http://www.farnell.com/datasheets/2111106.pdf?src-supplier=Newark, ComponentLink4URL=http://www.farnell.com/datasheets/2111106.pdf?src-supplier=Newark, Dominant Wavelength=470nm, Height=1.9mm, Length=3.2mm, Lens Style=Round, Lens Transparency=Diffused, Luminous Intensity=350mcd, Mount="Surface Mount", Number of Pins=4, Packaging="Cut Tape", Pricing 1="1=0.60000, 10=0.47100, 100=0.30210, 500=0.25980, 1000=0.20059 (USD)", REACH SVHC="No SVHC", RoHS=Yes, Stock 1=142531, Supplier 1=Digi-Key, Viewing Angle=115∑, Width=2.8mm
F1 F3 F4 F5 F6 F7 F9 F10 F11: "FUSE SMD 125mA 125V", Case/Package=1206, Case Code (Metric)=3216, Current Rating=125mA, DC Cold Resistance=4R, Manufacturer 1=Littelfuse, Manufacturer Part Number 1=0466.125NRHF, Max Operating Temperature=90∑C, Min Operating Temperature=-55∑C, Package Quantity=5000, Power Dissipation=69.1mW, Supplier Part Number 1=F6016CT-ND, Voltage Rating (AC)=125V, Approvals=UL,CSA, Case Code (Imperial)=1206, ComponentLink1Description=https://datasheet.ciiva.com/303/littelfuse-fuse-466-303205.pdf?src-supplier=Digi-Key, ComponentLink1URL=https://datasheet.ciiva.com/303/littelfuse-fuse-466-303205.pdf?src-supplier=Digi-Key, Depth=1.52mm, Fuse Type="Board Mount (Cartridge Style Excluded)", Height=0.023inch, Housing Material=Ceramic, Lead Free="Lead Free", Length=3.18mm, Mount="Surface Mount", Packaging="Tape and Reel", Pricing 1="1=0.84000, 5=0.81200, 10=0.78700, 50=0.66180, 100=0.54930, 250=0.49940, 500=0.42450, 1000=0.37455 (USD)", RoHS=Yes, Stock 1=10036, Supplier 1=Digi-Key, Voltage Rating (DC)=125V, Width=0.06inch, Working Voltage=125V
F2: "FUSE SMD 1.25A 63V", Case/Package=1206, Case Code (Metric)=3216, Current Rating=1.25A, DC Cold Resistance=59mR, Manufacturer 1=Littelfuse, Manufacturer Part Number 1=04661.25NRHF, Max Operating Temperature=90∑C, Min Operating Temperature=-55∑C, Supplier Part Number 1=F11418CT-ND, Voltage Rating (AC)=63V, Approvals=UL,CSA, Case Code (Imperial)=1206, ComponentLink1Description=https://www.littelfuse.com/~/media/electronics/datasheets/fuses/littelfuse_fuse_466_datasheet.pdf.pdf?src-supplier=Digi-Key, ComponentLink1URL=https://www.littelfuse.com/~/media/electronics/datasheets/fuses/littelfuse_fuse_466_datasheet.pdf.pdf?src-supplier=Digi-Key, Fuse Type="Board Mount (Cartridge Style Excluded)", Mount="Surface Mount", Packaging="Tape and Reel", Pricing 1="1=0.84000, 5=0.81200, 10=0.78700, 50=0.66180, 100=0.54930, 250=0.49940, 500=0.42450, 1000=0.37455 (USD)", RoHS=No, Stock 1=5020, Supplier 1=Digi-Key, Voltage Rating (DC)=63V
F8: "FUSE SMD 2A 63V", Case/Package=1206, Case Code (Metric)=3216, Current=2A, DC Cold Resistance=31mR, Manufacturer 1=Littelfuse, Manufacturer Part Number 1=0466002.NRHF, Max Operating Temperature=90∑C, Min Operating Temperature=-55∑C, Package Quantity=5000, Power Dissipation=157.5mW, Supplier Part Number 1=F5696CT-ND, Voltage Rating (AC)=63V, Approvals=UL,CSA, Case Code (Imperial)=1206, ComponentLink1Description=https://datasheet.ciiva.com/7444/littelfuse-fuse-466-7444359.pdf?src-supplier=Digi-Key, ComponentLink1URL=https://datasheet.ciiva.com/7444/littelfuse-fuse-466-7444359.pdf?src-supplier=Digi-Key, ComponentLink2Description=https://datasheet.ciiva.com/7444/littelfuse-fuse-466-7444363.pdf?src-supplier=Digi-Key, ComponentLink2URL=https://datasheet.ciiva.com/7444/littelfuse-fuse-466-7444363.pdf?src-supplier=Digi-Key, ComponentLink3Description=https://datasheet.ciiva.com/7444/littelfuse-fuse-466-7444350.pdf?src-supplier=Digi-Key, ComponentLink3URL=https://datasheet.ciiva.com/7444/littelfuse-fuse-466-7444350.pdf?src-supplier=Digi-Key, Current Rating=2A, Depth=1.52mm, Fuse Type="Board Mount (Cartridge Style Excluded)", Height=0.023inch, Housing Material=Ceramic, Length=3.18mm, Mount="Surface Mount", Packaging="Tape and Reel", Pricing 1="1=0.84000, 5=0.81200, 10=0.78700, 50=0.66180, 100=0.54930, 250=0.49940, 500=0.42450, 1000=0.37455 (USD)", RoHS=Yes, Stock 1=8989, Supplier 1=Digi-Key, Voltage Rating (DC)=63V, Width=0.06inch
H1 H2 H3 H4: "6cm x 6cm"
J1: "CONN HEADER SMD VERTICAL 1.5MM PITCH", Color=Beige, Current Rating=2A, Manufacturer 1=Molex, Manufacturer Part Number 1=5025840570, Max Operating Temperature=85∑C, Min Operating Temperature=-25∑C, Package Quantity=900, Supplier Part Number 1=WM14463CT-ND, Voltage Rating=100V, ComponentLink1Description=https://datasheet.ciiva.com/756/5025840370-sd-756789.pdf?src-supplier=Digi-Key, ComponentLink1URL=https://datasheet.ciiva.com/756/5025840370-sd-756789.pdf?src-supplier=Digi-Key, ComponentLink2Description=https://datasheet.ciiva.com/30117/81825025840570-pcb-receptacles-30117024.pdf?src-supplier=Onlinecomponents.com, ComponentLink2URL=https://datasheet.ciiva.com/30117/81825025840570-pcb-receptacles-30117024.pdf?src-supplier=Onlinecomponents.com, ComponentLink3Description=https://datasheet.ciiva.com/10084/5025840570-pcb-receptacles-10084838.pdf?src-supplier=Avnet, ComponentLink3URL=https://datasheet.ciiva.com/10084/5025840570-pcb-receptacles-10084838.pdf?src-supplier=Avnet, ComponentLink4Description=https://datasheet.ciiva.com/13669/5025840570-pcb-receptacles-179570-13669898.pdf?src-supplier=Mouser, ComponentLink4URL=https://datasheet.ciiva.com/13669/5025840570-pcb-receptacles-179570-13669898.pdf?src-supplier=Mouser, Connector Type="Receptacle,Center Strip Contact", Contact Gender=Female, Contact Material="Copper Alloy", Contact Plating=Tin, Depth=6.35mm, Fastening Type=Latch, Gender=Female, Glow Wire Compliant=Non-compliant, Housing Color=Beige, Housing Material=Resin, Length=11.8mm, Mount="Surface Mount", Number of Circuits=5, Number of Contacts=5, Number of Positions=5, Number of Rows=1, Orientation=Vertical, Packaging="Tape and Reel", Pitch=1.5mm, Pricing 1="1=0.66000, 10=0.61400, 100=0.47110 (USD)", Radiation Hardening=No, REACH SVHC="No SVHC", RoHS=Yes, Stock 1=2875, Supplier 1=Digi-Key, Termination=Solder
J2 J3 J5 J9: "CONN HEADER SMD RIGHT ANGLE 1.5MM PITCH", Color=Beige, Current Rating=1A, Manufacturer 1=Molex, Manufacturer Part Number 1=5031482090, Max Operating Temperature=85∑C, Min Operating Temperature=-25∑C, Package Quantity=550, Supplier Part Number 1=WM9451CT-ND, Voltage Rating=100V, ComponentLink1Description=https://datasheet.ciiva.com/6787/5031482090-sd-6787557.pdf?src-supplier=Digi-Key, ComponentLink1URL=https://datasheet.ciiva.com/6787/5031482090-sd-6787557.pdf?src-supplier=Digi-Key, ComponentLink2Description=https://datasheet.ciiva.com/10076/5031482090-pcb-receptacles-10076785.pdf?src-supplier=Avnet, ComponentLink2URL=https://datasheet.ciiva.com/10076/5031482090-pcb-receptacles-10076785.pdf?src-supplier=Avnet, ComponentLink3Description=https://datasheet.ciiva.com/5153/5031482090-pcb-receptacles-179510-5153198.pdf?src-supplier=Mouser, ComponentLink3URL=https://datasheet.ciiva.com/5153/5031482090-pcb-receptacles-179510-5153198.pdf?src-supplier=Mouser, ComponentLink4Description=https://datasheet.ciiva.com/30082/72715031482090-pcb-receptacles-30082526.pdf?src-supplier=Onlinecomponents.com, ComponentLink4URL=https://datasheet.ciiva.com/30082/72715031482090-pcb-receptacles-30082526.pdf?src-supplier=Onlinecomponents.com, ComponentLink5Description=https://datasheet.ciiva.com/6787/5031482090-sd-6787542.pdf?src-supplier=Digi-Key, ComponentLink5URL=https://datasheet.ciiva.com/6787/5031482090-sd-6787542.pdf?src-supplier=Digi-Key, ComponentLink6Description=https://datasheet.ciiva.com/6787/5031482090-sd-6787548.pdf?src-supplier=Digi-Key, ComponentLink6URL=https://datasheet.ciiva.com/6787/5031482090-sd-6787548.pdf?src-supplier=Digi-Key, Connector Type="Receptacle,Forked,Center Strip Contact", Contact Gender=Female, Contact Material="Copper Alloy,Copper,Tin", Contact Plating=Tin, Depth=9.55mm, Fastening Type=Latch, Gender=Receptacle, Glow Wire Compliant=Non-compliant, Housing Color=Beige, Housing Material=Resin, Length=19.3mm, Mount="Surface Mount,Through Hole", Number of Circuits=20, Number of Contacts=20, Number of Positions=20, Number of Rows=2, Orientation="Right Angle", Packaging="Tape and Reel", Pitch=1.5mm, Pricing 1="1=2.37000, 10=2.14700, 100=1.83990 (USD)", Radiation Hardening=No, REACH SVHC="No SVHC", RoHS=Yes, Row Spacing=1.5mm, Stock 1=1742, Supplier 1=Digi-Key, Termination=Solder
J4 J6: "CONN HEADER SMD RIGHT ANGLE 1.5MM PITCH", Color=Beige, Current Rating=1A, Manufacturer 1=Molex, Manufacturer Part Number 1=5031481290, Max Operating Temperature=85∑C, Min Operating Temperature=-25∑C, Package Quantity=550, Supplier Part Number 1=WM14476CT-ND, Voltage Rating=100V, ComponentLink1Description=https://datasheet.ciiva.com/756/5031481090-sd-756828.pdf?src-supplier=Digi-Key, ComponentLink1URL=https://datasheet.ciiva.com/756/5031481090-sd-756828.pdf?src-supplier=Digi-Key, ComponentLink2Description=https://datasheet.ciiva.com/10083/5031481290-pcb-receptacles-10083012.pdf?src-supplier=Avnet, ComponentLink2URL=https://datasheet.ciiva.com/10083/5031481290-pcb-receptacles-10083012.pdf?src-supplier=Avnet, ComponentLink3Description=https://datasheet.ciiva.com/30261/68305031481290-pcb-receptacles-30261716.pdf?src-supplier=Onlinecomponents.com, ComponentLink3URL=https://datasheet.ciiva.com/30261/68305031481290-pcb-receptacles-30261716.pdf?src-supplier=Onlinecomponents.com, ComponentLink4Description=https://datasheet.ciiva.com/5162/5031481290-pcb-receptacles-179578-5162271.pdf?src-supplier=Mouser, ComponentLink4URL=https://datasheet.ciiva.com/5162/5031481290-pcb-receptacles-179578-5162271.pdf?src-supplier=Mouser, ComponentLink5Description=https://datasheet.ciiva.com/14155/503148-eng-tds-14155950.pdf?src-supplier=Distrelec, ComponentLink5URL=https://datasheet.ciiva.com/14155/503148-eng-tds-14155950.pdf?src-supplier=Distrelec, Connector Type="Receptacle,Center Strip Contact", Contact Gender=Female, Contact Material="Copper Alloy,Copper,Tin", Contact Plating=Tin, Depth=9.55mm, Fastening Type=Latch, Gender=Receptacle, Glow Wire Compliant=Non-compliant, Housing Color=Beige, Housing Material=Resin, Length=13.3mm, Mount="Surface Mount,Through Hole", Number of Circuits=12, Number of Contacts=12, Number of Positions=12, Number of Rows=2, Orientation="Right Angle", Packaging="Tape and Reel", Pitch=1.5mm, Pricing 1="1=1.86000, 10=1.68800, 100=1.44720 (USD)", Radiation Hardening=No, REACH SVHC=Unknown, RoHS=Yes, Stock 1=276, Supplier 1=Digi-Key, Termination=Solder
J7: "CONN HEADER SMD RIGHT ANGLE 2MM PITCH", Flammability Rating="UL94 V-0", Insulation Color=Natural, Manufacturer 1=Molex, Manufacturer Part Number 1=5024940270, Max Operating Temperature=105∑C, Min Operating Temperature=-40∑C, Supplier Part Number 1=WM15810CT-ND, ComponentLink1Description=https://www.molex.com/pdm_docs/as/AS-502439-002-001.pdf?src-supplier=Digi-Key, ComponentLink1URL=https://www.molex.com/pdm_docs/as/AS-502439-002-001.pdf?src-supplier=Digi-Key, Connector Type=Receptacle,Forked, Contact Plating=Tin, Fastening Type=Latch, Insulation Material=Resin, Mount="Surface Mount", Number of Positions=2, Number of Rows=1, Packaging="Tape and Reel", Pricing 1="1=0.53000, 10=0.49400, 25=0.44440, 50=0.39500, 100=0.37850, 250=0.34556 (USD)", RoHS=No, Stock 1=3397, Supplier 1=Digi-Key, Termination=Solder
J8: "CONN HEADER VERT 8POS 2.54MM", Manufacturer 1="Harwin Inc.", Manufacturer Part Number 1=M20-9980445, Supplier Part Number 1=952-2122-ND, Supplier 1=Digi-Key
R1 R2 R30 R49 R52: "RES SMD 120 OHM 5% 1/10W 0603", Manufacturer=Yageo, MPN=RC0603JR-07120RL, Package="0603 (1608 Metric)", Supplier Part Number 1=311-120GRCT-ND, Tolerance=5%, Dimensions="0.063\" L x 0.031\" W (1.60mm x 0.80mm)", Supplier 1=Digi-Key
R3 R10: "RES SMD 825K OHM 1% 1/10W 0603", Manufacturer=Yageo, MPN=RC0603FR-07825KL, Package="0603 (1608 Metric)", Supplier Part Number 1=311-825KHRCT-ND, Tolerance=1%, Dimensions="0.063\" L x 0.031\" W (1.60mm x 0.80mm)", Supplier 1=Digi-Key
R4: library part RES_1K1_0603, "RES SMD 1.1K OHM 1% 1/10W 0603", Manufacturer=Yageo, MPN=RC0603FR-071K1L, Package="0603 (1608 Metric)", Supplier Part Number 1=311-1.10KHRCT-ND, Tolerance=1%, Dimensions="0.063\" L x 0.031\" W (1.60mm x 0.80mm)", Supplier 1=Digi-Key
R5 R7: "RES SMD 165K OHM 1% 1/10W 0603", Manufacturer=Yageo, MPN=RC0603FR-07165KL, Package="0603 (1608 Metric)", Supplier Part Number 1=311-165KHRCT-ND, Tolerance=1%, Dimensions="0.063\" L x 0.031\" W (1.60mm x 0.80mm)", Supplier 1=Digi-Key
R6 R11: "RES SMD 14.3K OHM 1% 1/10W 0603", Manufacturer=Yageo, MPN=RC0603FR-0714K3L, Package="0603 (1608 Metric)", Supplier Part Number 1=311-14.3KHRCT-ND, Tolerance=1%, Dimensions="0.063\" L x 0.031\" W (1.60mm x 0.80mm)", Supplier 1=Digi-Key
R8 R31 R32 R35 R36 R39 R40 R43 R44 R47: "RES SMD 2.2K OHM 1% 1/10W 0603", Manufacturer=Yageo, MPN=RC0603FR-072K2L, Package="0603 (1608 Metric)", Supplier Part Number 1=311-2.20KHRCT-ND, Tolerance=1%, Dimensions="0.063\" L x 0.031\" W (1.60mm x 0.80mm)", Supplier 1=Digi-Key
R9: library part RES_14K3_0603, "RES SMD 14.3K OHM 1% 1/10W 0603", Manufacturer=Yageo, MPN=RC0603FR-0714K3L, Package="0603 (1608 Metric)", Supplier Part Number 1=311-14.3KHRCT-ND, Tolerance=1%, Dimensions="0.063\" L x 0.031\" W (1.60mm x 0.80mm)", Supplier 1=Digi-Key
R12: "RES SMD 1K OHM 5% 1/10W 0603", Manufacturer=Yageo, MPN=RC0603JR-071KL, Package="0603 (1608 Metric)", Supplier Part Number 1=311-1.0KGRCT-ND, Tolerance=5%, Dimensions="0.063\" L x 0.031\" W (1.60mm x 0.80mm)", Supplier 1=Digi-Key
R13 R14 R15 R16 R17 R18 R19 R20 R21 R22 R23 R24 R25 R26 R27 R28 R29 R50: "RES SMD 10K OHM 5% 1/10W 0603", Manufacturer=Yageo, MPN=RC0603JR-0710KL, Package="0603 (1608 Metric)", Supplier Part Number 1=311-10KGRCT-ND, Tolerance=5%, Dimensions="0.063\" L x 0.031\" W (1.60mm x 0.80mm)", Supplier 1=Digi-Key
R33 R34 R37 R38 R41 R42 R45 R46 R48: "RES SMD 3.3K OHM 5% 1/10W 0603", Digikey Part Number=311-3.3KGRCT-ND, Manufacturer=Yageo, MPN=RC0603JR-073K3L, Package="0603 (1608 Metric)", Tolerance=5%, Dimensions="0.063\" L x 0.031\" W (1.60mm x 0.80mm)", Supplier 1=Digi-Key, Supplier Part Number 1=311-3.3KGRCT-ND
R51 R53: "RES SMD 20 OHM 5% 1/10W 0603", Manufacturer=Yageo, MPN=RC0603JR-0720RL, Package="0603 (1608 Metric)", Supplier Part Number 1=311-20GRCT-ND, Tolerance=5%, Dimensions="0.063\" L x 0.031\" W (1.60mm x 0.80mm)", Supplier 1=Digi-Key
S1: "Power Switch (Red)", Manufacturer=C&K, MPN="PTS830GM140 SMTR LFS", Supplier Part Number 1=CKN10587CT-ND, ComponentLink1Description=Datasheet, ComponentLink1URL=https://www.ckswitches.com/media/1478/pts830.pdf, Supplier 1=Digi-Key
S2: "Tactile Switch (Grey)", Manufacturer="Omron Electronics Inc-EMC Div", MPN=B3U-1100P, Supplier Part Number 1=SW1021TR-ND, Supplier 1=Digi-Key
U1 U2: library part LTC2875, "IC TXRX CAN 4MBPS 8SO", Manufacturer="Linear Technologies", MPN=LTC2875IS8#PBF, Package="8-SOIC (0.154\", 3.90mm Width)", Supplier Part Number 1=LTC2875IS8#PBF-ND, ComponentLink1Description=Datasheet, ComponentLink1URL=https://www.analog.com/media/en/technical-documentation/data-sheets/2875f.pdf, Supplier 1=Digi-Key
U3: library part OPAMP, "IC OPAMP GP 1 CIRCUIT SOT23-5", Manufacturer="Texas Instruments", Rating=Catalog, Supplier Part Number 1=296-35607-1-ND, Total Supply Voltage(Max)(+5V is 5, +/-5V is 10)=5.5, Total Supply Voltage(Min)(+5V is 5, +/-5V is 10)=1.8, CMRR(Min)(dB)=70, Code_JEDEC=MO-178, ComponentLink1Description="Manufacturer URL", ComponentLink1URL=http://www.ti.com/, ComponentLink2Description=Datasheet, ComponentLink2URL=http://www.ti.com/lit/ds/symlink/opa313.pdf, ComponentLink3Description="Package Specification", ComponentLink3URL=http://www.ti.com/litv/pdf/mpds018i, DatasheetVersion=SBOS649C, Eco-Plan="Green (RoHS & no Sb/Br)", GBW(Typ)(MHz)=1, Iq per channel(Max)(mA)=0.06, Mounting Technology="Surface Mount", Number of Channels=1, Offset Drift(Typ)(uV/C)=2, PackageDescription="5-Pin Plastic Small Outline, Body 1.6 x 2.9 mm, Pitch 0.95 mm", PackageReference=DBV0005A, PackageVersion="4073253-4/K, 03/2006", Packing="LARGE T&R", PartNumber=OPA313IDBVR, Slew Rate(Typ)(V/us)=0.5, SubFamily="Low Input Bias Current Amp (<=10pA), Low Power Amp (<=500uA)", Supplier 1=Digi-Key, Vio (25C)(Max)(mV)=2.5
U4: "IC OPAMP GP 1 CIRCUIT 8SOIC", Manufacturer="Renesas Electronics America Inc.", Supplier Part Number 1=CA3140AMZ-ND, MPN=CA3140AMZ, Supplier 1=Digi-Key
U5: library part CMP-0243-00221-1, "ARM Cortex-M4 32-bit MCU+FPU, 512 KB Flash, 128 KB Internal RAM, 81 I/Os, 100-Pin LQFP, -40 to 105 degC, Tray", I/Os (High Current)=81, Operating Frequency(F) (Processor speed) (MHz)=180, Package Description=LQFP100, Package Reference="100-Pin Low Profile Quad Flat Package, Body 14 x 14 mm, Pitch 0.5 mm", Supply Voltage(Vcc) min (V)=1.7, ComponentLink1Description="Manufacturer URL", ComponentLink1URL=http://www.st.com/, ComponentLink2Description=Datasheet, ComponentLink2URL=http://www.st.com/st-web-ui/static/active/en/resource/technical/document/datasheet/DM00141306.pdf, Core="ARM Cortex-M4", D/A Converter=2, DatasheetVersion="Rev. 6", FLASH Size (Prog) (kB)=512, Internal RAM Size (kB)=128, Mounting Technology="Surface Mount", Packing=Tray
U6: library part IC_LVL_SHIFTER_TI, "IC BIDIRECTIONAL LEVEL SHIFTER", Case/Package=SC, High Level Output Current=-32mA, Low Level Output Current=32mA, Manufacturer 1="Texas Instruments", Max Operating Temperature=125∑C, Max Supply Voltage=5.5V, Min Operating Temperature=-40∑C, Min Supply Voltage=1.65V, Package Quantity=3000, Quiescent Current=10uA, Supplier Part Number 1=296-39212-1-ND, Channel Type=Bidirectional, ComponentLink1Description=https://datasheet.ciiva.com/6615/sn74lvc1t45-q1-6615008.pdf?src-supplier=Digi-Key, ComponentLink1URL=https://datasheet.ciiva.com/6615/sn74lvc1t45-q1-6615008.pdf?src-supplier=Digi-Key, ComponentLink2Description=https://datasheet.ciiva.com/12072/sces677b-213901-12072996.pdf?src-supplier=Mouser, ComponentLink2URL=https://datasheet.ciiva.com/12072/sces677b-213901-12072996.pdf?src-supplier=Mouser, ComponentLink3Description=https://datasheet.ciiva.com/15096/getdatasheetpartid-701994-15096516.pdf?src-supplier=Verical, ComponentLink3URL=https://datasheet.ciiva.com/15096/getdatasheetpartid-701994-15096516.pdf?src-supplier=Verical, ComponentLink4Description=https://datasheet.ciiva.com/29887/sn74lvc1t45-q1-29887614.pdf?src-supplier=Avnet, ComponentLink4URL=https://datasheet.ciiva.com/29887/sn74lvc1t45-q1-29887614.pdf?src-supplier=Avnet, Data Rate=420Mbps, Lead Free="Lead Free", Logic Function=Translator, Manufacturer Part Number 1=SN74LVC1T45QDCKRQ1, Mount="Surface Mount", Number of Bits=1, Number of Channels=1, Number of Circuits=1, Number of Pins=6, Packaging="Tape and Reel", Pricing 1="1=0.59000, 10=0.51500, 25=0.48360, 100=0.39470, 250=0.36660, 500=0.31200, 1000=0.24960 (USD)", Propagation Delay=6.9ns, Radiation Hardening=No, REACH SVHC="No SVHC", RoHS=Yes, Stock 1=7633, Supplier 1=Digi-Key, Turn-On Delay Time=6.9ns, Weight=0.000988oz
U7 U8 U9: library part CMP-0859-00013-4, "Dual-Bit Dual Supply Transceiver with Configurable Voltage Translation and 3-State Outputs, DCU0008A, LARGE T&R", F @ Nom Voltage(Max)(Mhz)=150, Generic Part Number=SN74LVC2T45, ICC @ Nom Voltage(Max)(mA)=0.004, Manufacturer="Texas Instruments", Operating Temperature Range(C)="-40 to 85", Rating=Military, tpd @ Nom Voltage(Max)(ns)=17.7,10.3,8.3,7.2, Voltage(Nom)(V)=1.8,2.5,3.3,5, 3-State Output=Yes, Bits(#)=2, DatasheetVersion=SCES516J, Input Type=CMOS/TTL, Logic=True, Output Drive (IOL/IOH)(Max)(mA)=32/-32, Output Type=CMOS, PackageReference=DCU0008A, Schmitt Trigger=No, Sub-Family="Dual Supply Translator", Technology Family=LVC, VCC(Max)(V)=5.5, VCC(Min)(V)=1.65
VR1: "IC REG LINEAR 3.3V 1A DPAK", Current Output=1A, Manufacturer="ON Semiconductor", MPN=NCP1117DT33T5G, Supplier Part Number 1=NCP1117DT33T5GOSCT-ND, Supplier 1=Digi-Key

## Nets (pads, with @x,y where several pads share a name; then routed paths per layer and width w, separated by ;. In a path a pad name is that pad's centre, name@x,y a point inside that pad or via, vN(x,y) a via of type N, cw(c..) or ccw(c..) an arc to the next point about the centre after c; other vN are vias at no path point)
+3V3: +3V3.1 C1.2 C2.2 C4.2 C6.2 C7.1 C8.1 C9.1 C10.1 C11.1 C12.1 C13.2 C14.2 C15.1 C16.2 C17.1 C24.1 C34.2 C36.2 C38.2 D6.4 J3.17 J8.1 R4.2 R13.2 R14.2 R15.2 R16.2 R17.2 R18.2 R21.2 R22.2 R23.2 R24.2 R30.2 R50.2 U1.3 U2.3 U3.5 U4.7 U5.6 U5.11 U5.19 U5.21 U5.22 U5.28 U5.50 U5.75 U5.100 U6.6 U7.8 U8.8 U9.8 VR1.2
+5V0: C23.1 C35.2 C37.2 C39.2 F1.2 F2.2 F3.2 F4.2 F5.2 F6.2 F7.2 F8.2 F9.1 F10.1 F11.1 U6.1 U7.1 U8.1 U9.1 VR1.3
CAN1_N: CAN1L.1 D3.2 J6.3 J6.4 R1.1 U1.6
CAN1_P: CAN1.1 CAN1H.1 D3.1 J6.1 J6.2 U1.7
CAN2_N: CAN2L.1 D2.2 J6.11 J6.12 R2.1 U2.6
CAN2_P: CAN2.1 CAN2H.1 D2.1 J6.9 J6.10 U2.7
GND: C1.1 C2.1 C3.1 C4.1 C5.1 C6.1 C7.2 C8.2 C9.2 C10.2 C11.2 C12.2 C13.1 C14.1 C15.2 C16.1 C17.2 C20.1 C21.1 C22.1 C23.2 C24.2 C25.1 C26.1 C27.1 C28.1 C29.1 C30.1 C31.1 C32.1 C33.1 C34.1 C35.1 C36.1 C37.1 C38.1 C39.1 D1.2 D2.3 D3.3 D4.2 D5.2 GND.1 GND_CAN.1 GND_FSR.1 GND_SPI.1 J1.0 J1.5 J2.0 J2.2 J2.4 J2.6 J2.8 J2.10 J2.12 J2.16 J2.18 J2.20 J3.0 J3.2 J3.4 J3.6 J3.8 J3.10 J3.14 J3.16 J3.18 J4.0 J4.5 J4.6 J4.11 J4.12 J5.0 J5.6 J5.8 J5.10 J5.12 J5.14 J5.16 J5.18 J5.20 J6.0 J6.5 J6.6 J6.7 J6.8 J7.0 J7.2 J8.5 J9.0 J9.5 J9.6 J9.11 J9.12 J9.17 J9.18 R8.1 R9.1 R10.1 R12.1 R19.1 R20.1 R25.1 R26.1 R27.1 R28.1 R29.2 R33.1 R34.1 R37.1 R38.1 R41.1 R42.1 R45.1 R46.1 R48.1 S1.1 S2.2 U1.2 U1.8 U2.2 U2.8 U3.2 U4.4 U5.10 U5.20 U5.27 U5.49 U5.74 U5.99 U6.2 U6.5 U7.4 U7.5 U8.4 U8.5 U9.4 U9.5 VR1.1
NetC3_2: C3.2 C5.2 FSR_OUT.1 R6.2 R11.2 U5.16
NetC18_2: U5.12
NetC19_2: U5.13
NetC20_2: C20.2 J8.8 U5.14
NetC21_2: C21.2 U5.73
NetC22_2: C22.2 U5.48
NetC25_2: C25.2 R31.1 R33.2 U5.42
NetC26_2: C26.2 R32.1 R34.2 U5.24
NetC27_2: C27.2 R35.1 R37.2 U5.40
NetC28_2: C28.2 R36.1 R38.2 U5.23
NetC29_2: C29.2 R39.1 R41.2 U5.53
NetC30_2: C30.2 R40.1 R42.2 U5.90
NetC31_2: C31.2 R43.1 R46.2 U5.63
NetC32_2: C32.2 R44.1 R45.2 U5.64
NetC33_2: C33.2 R47.1 R48.2 U5.25
NetCAN1_2: CAN1.2 R1.2
NetCAN2_2: CAN2.2 R2.2
NetD1_1: D1.1 F8.1 J7.1
NetD4_1: D4.1 R30.1
NetD5_1: D5.1 R49.2
NetD6_1: D6.1 R52.2
NetD6_2: D6.2 R53.1
NetD6_3: D6.3 R51.1
NetF1_1: F1.1 J2.9
NetF2_1: F2.1 J2.17
NetF3_1: F3.1 J3.7
NetF4_1: F4.1 J2.1
NetF5_1: F5.1 J3.12
NetF6_1: F6.1 J5.17
NetF7_1: F7.1 J5.5
NetF9_2: F9.2 J9.1
NetF10_2: F10.2 J9.7
NetF11_2: F11.2 J9.13
NetFSR1-1_1: FSR1-1.1 FSR2-1.1 J3.19
NetFSR1-1_2: FSR1-1.2 FSR_Va.1 R5.1 R8.2
NetFSR1-2_1: FSR1-2.1 R3.2 U3.1
NetFSR1-2_2: FSR1-2.2 R6.1
NetFSR2-1_2: FSR2-1.2 FSR_BUFF.1 R12.2 U4.3
NetFSR2-2_1: FSR2-2.1 U4.6
NetFSR2-2_2: FSR2-2.2 R11.1
NetFSR_Vb_1: FSR_Vb.1 R4.1 R7.1 R9.2
NetJ1_1: J1.1 U5.97
NetJ1_2: J1.2 R19.2 U5.95
NetJ1_3: J1.3 U5.98
NetJ1_4: J1.4 R20.2 U5.96
NetJ2_3: J2.3 R39.2
NetJ2_5: J2.5 R13.1 U5.45
NetJ2_7: J2.7 R14.1 U5.44
NetJ2_11: J2.11 R31.2
NetJ2_13: J2.13 R35.2
NetJ2_15: J2.15 R15.1 U5.36
NetJ2_19: J2.19 U6.3
NetJ3_1: J3.1 R16.1 U5.30
NetJ3_3: J3.3 R17.1 U5.29
NetJ3_5: J3.5 R18.1 U5.26
NetJ3_9: J3.9 R32.2
NetJ3_11: J3.11 R36.2
NetJ3_13: J3.13 R44.2
NetJ3_15: J3.15 R40.2
NetJ4_1: J4.1 R28.2 U5.62
NetJ4_2: J4.2 R25.2 U5.61
NetJ4_3: J4.3 R27.2 U5.60
NetJ4_4: J4.4 R26.2 U5.59
NetJ4_7: J4.7 U5.58
NetJ4_8: J4.8 U5.57
NetJ4_9: J4.9 U5.56
NetJ4_10: J4.10 U5.55
NetJ5_7: J5.7 R47.2
NetJ5_9: J5.9 R24.1 U5.87
NetJ5_11: J5.11 R23.1 U5.86
NetJ5_13: J5.13 R22.1 U5.84
NetJ5_15: J5.15 R21.1 U5.83
NetJ5_19: J5.19 R43.2
NetJ8_2: J8.2 SERIAL_TX.1 U5.39
NetJ8_3: J8.3 SERIAL_RX.1 U5.38
NetJ8_4: J8.4 U5.65
NetJ8_6: J8.6 U5.72
NetJ8_7: J8.7 U5.76
NetJ9_4: J9.4 SPI2_MISO.1 U5.17
NetJ9_10: J9.10 SPI4_MISO.1 U5.4
NetJ9_16: J9.16 SPI1_MISO.1 U5.31
NetR3_1: R3.1 R5.2 U3.4